# EAGLE board datalogger-hat-brd (EAGLE 9.2.2)
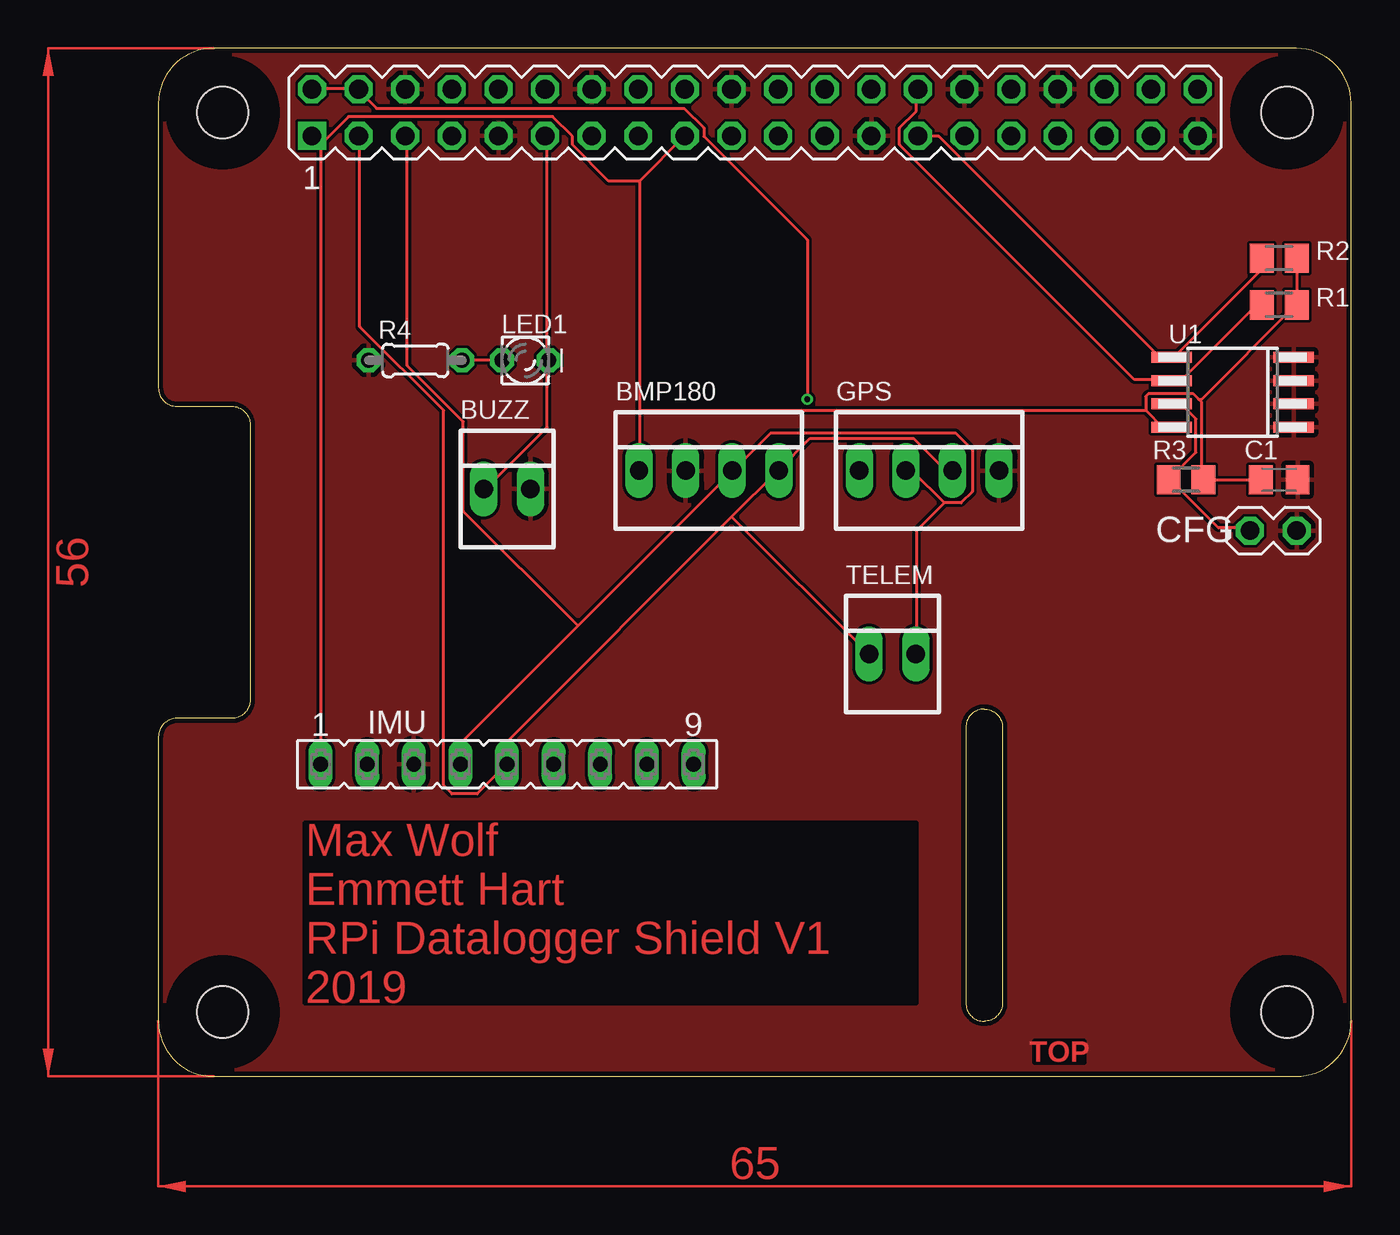
[diagram p0: board, top side]
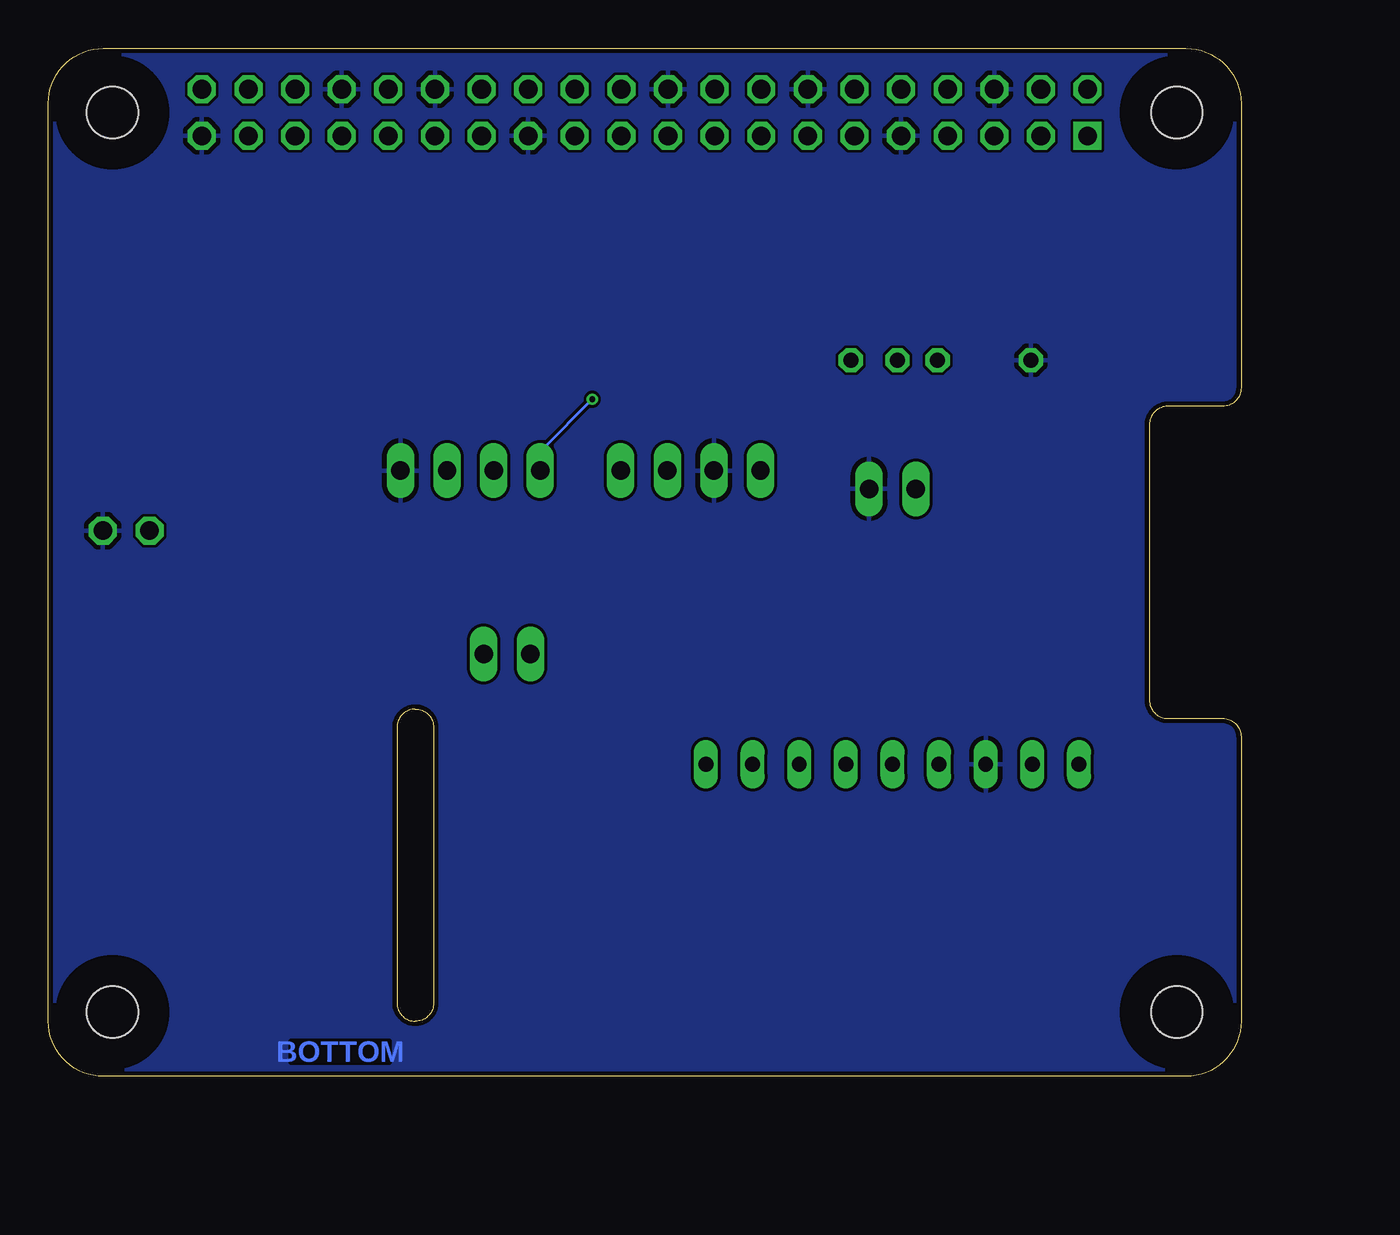
[diagram p1: board, bottom side, seen from below]

Size 65 x 56 mm. Coordinates in mm from the lower left corner, seen from the top.
Outline: 0,3 arc90 3,0 62,0 arc90 65,3 65,53 arc90 62,56 3,56 arc90 0,53 0,37.5 arc90 1,36.5 4,36.5 arc-90 5,35.5 5,20.5 arc-90 4,19.5 1,19.5 arc90 0,18.5 0,3
Outline: 44,19 44,4 arc90 45,3 arc90 46,4 46,19 arc90 45,20 arc90 44,19
Copper layers (1*16): Top 0.035mm / dielectric 1.5mm / Bottom 0.035mm
Design rules "ITEADstudio_DRC": minimum track width 6mil, minimum drill 12mil, track to track 6mil, track to pad 6mil, pad to pad 6mil, via to via 6mil, smd to smd 0mil, copper to edge 10mil, drill to drill 10mil, minimum pad ring 10mil, minimum via ring 6mil, stop-mask expansion 2mil, vias tented up to drill 100mil, thermal gap 10mil
Holes 2.8 mm at 3.5,3.5 3.5,52.5 61.5,52.5 61.5,3.5
tRestrict: area 1.9,51 to 5,54; area 60,51 to 63,54; area 60,1.9 to 63,5; area 1.9,1.9 to 5,5
bRestrict: area 1.9,1.9 to 5,5; area 1.9,51 to 5,54; area 60,1.9 to 63,5; area 60,51 to 63,54
Milling: 6 lines

## Footprints (pad centres in the part's own frame; a part is rotated, then mirrored left to right if it is on the bottom)
22-23-2041 = drill 1 long: 1 -3.81,0; 2 -1.27,0; 3 1.27,0; 4 3.81,0
22-23-2021 = drill 1 long: 1 -1.27,0; 2 1.27,0
C0805K = smd 1.3 x 1.6: 1 -1,0; 2 1,0
PIN_W_2 = drill 1.016 octagon: 1 0,0; 2 0,-2.54
FE09 = drill 0.813 long: 1 -10.16,0; 2 -7.62,0; 3 -5.08,0; 4 -2.54,0; 5 0,0; 6 2.54,0; 7 5.08,0; 8 7.62,0; 9 10.16,0
PIN_20X2 = drill 1.016 square: 1 -24.13,-1.27 | drill 1.016 octagon: 2 -24.13,1.27; 3 -21.59,-1.27; 4 -21.59,1.27; 5 -19.05,-1.27; 6 -19.05,1.27; 7 -16.51,-1.27; 8 -16.51,1.27; 9 -13.97,-1.27; 10 -13.97,1.27; 11 -11.43,-1.27; 12 -11.43,1.27; 13 -8.89,-1.27; 14 -8.89,1.27; 15 -6.35,-1.27; 16 -6.35,1.27; 17 -3.81,-1.27; 18 -3.81,1.27; 19 -1.27,-1.27; 20 -1.27,1.27; 21 1.27,-1.27; 22 1.27,1.27; 23 3.81,-1.27; 24 3.81,1.27; 25 6.35,-1.27; 26 6.35,1.27; 27 8.89,-1.27; 28 8.89,1.27; 29 11.43,-1.27; 30 11.43,1.27; 31 13.97,-1.27; 32 13.97,1.27; 33 16.51,-1.27; 34 16.51,1.27; 35 19.05,-1.27; 36 19.05,1.27; 37 21.59,-1.27; 38 21.59,1.27; 39 24.13,-1.27; 40 24.13,1.27
LED_LD260 = drill 0.813 octagon: A -1.27,0; K 1.27,0
M0805 = smd 1.3 x 1.6: 1 -0.95,0; 2 0.95,0
0204/5 = drill 0.813 octagon: 1 -2.54,0; 2 2.54,0
SOIC8 = smd 0.6 x 2.2: 1 -1.905,-3.33; 2 -0.635,-3.33; 3 0.635,-3.33; 4 1.905,-3.33; 5 1.905,3.33; 6 0.635,3.33; 7 -0.635,3.33; 8 -1.905,3.33

## Placement (x,y rotation side)
BMP180  22-23-2041  [22-23-2041]  30,33 0 top
BUZZ  22-23-2021  [22-23-2021]  19,32 0 top
C1  100nF  [C0805K]  61.08,32.5 0 top
CFG  [PIN_W_2]  59.48,29.73 90 top
GPS  22-23-2041  [22-23-2041]  42,33 0 top
IMU  [FE09]  19,17 0 top
K1  PIN20X2  [PIN_20X2]  32.5,52.5 0 top
LED1  [LED_LD260]  20,39 0 top
R1  3k9  [M0805]  61.08,42.02 0 top
R2  3k9  [M0805]  61.08,44.56 0 top
R3  1k  [M0805]  55.99,32.5 0 top
R4  220  [0204/5]  14,39 0 top
TELEM  22-23-2021  [22-23-2021]  40,23 0 top
U1  EEPROM24  [SOIC8]  58.53,37.26 90 top

## Library data of the parts
BMP180 GPS = con-molex; MF: MOLEX; MPN: 22-23-2041; OC_FARNELL: 1462920; OC_NEWARK: 38C0355
BUZZ TELEM = con-molex; MF: MOLEX; MPN: 22-23-2021; OC_FARNELL: 1462926; OC_NEWARK: 25C3832
C1 = resistor; DIELECTRIC: X7R
CFG K1 U1 = FLYFISH
IMU = con-lsta; OC_FARNELL: unknown; OC_NEWARK: unknown
LED1 = eagle-ltspice; SPICEMODEL: NONE; SPICEPREFIX: D; SPICETYPE: diode
R1-R3 = resistor; TOLERANCE: 5%
R4 = rcl; SPICEPREFIX: R

## Nets
+3V3: BMP180.1 C1.1 IMU.1 K1.1 K1.17 R1.2 R2.2 R3.2 U1.8
+5V: GPS.1 K1.2 K1.4
GND: BMP180.2 BUZZ.2 C1.2 CFG.2 GPS.4 IMU.3 K1.6 K1.9 K1.14 K1.20 K1.25 K1.30 K1.34 K1.39 R4.1 U1.1 U1.2 U1.3 U1.4
N$1: K1.28 R1.1 U1.6
N$2: K1.27 R2.1 U1.5
N$3: CFG.1 R3.1 U1.7
N$4: BMP180.4 GPS.3 IMU.5 K1.3 TELEM.1
N$5: BMP180.3 GPS.2 IMU.4 K1.5 TELEM.2
N$6: BUZZ.1 K1.11 LED1.K
N$7: LED1.A R4.2

## Tracks (layer width: path | path; a pad name or v marks a point on that pad's centre or on a via)
+3V3
  Top 0.152: 8.84,50.75 8.84,17.07 IMU.1 | 8.84,50.75 8.38,51.21 K1.1 8.84,50.75 | R2.2 62.03,44.5 62.03,42.06 R1.2 61.87,41.91 56.84,36.88 56.69,36.88 | C1.1 60.05,32.46 57,32.46 R3.2 56.84,32.61 56.84,36.73 56.69,36.88 | 53.8,36.27 54.71,35.36 55.17,35.36 U1.8 | 53.8,36.27 53.8,37.03 53.95,37.19 56.39,37.19 56.69,36.88 | 26.21,48.77 26.21,36.27 | 26.21,36.27 26.21,33.07 BMP180.1 | 26.21,48.77 28.65,51.21 K1.17 | 26.21,36.27 53.8,36.27 | 8.84,50.75 10.36,52.27 21.49,52.27 22.55,51.21 22.55,50.75 24.54,48.77 26.21,48.77
+5V  (via drill 0.3)
  Top 0.152: K1.2 8.38,53.8 10.82,53.8 K1.4 10.97,53.65 11.89,52.73 28.65,52.73 29.72,51.66 29.72,51.21 35.36,45.57 v35.36,36.88
  Bottom 0.152: v35.36,36.88 38.1,34.14 38.1,33.07 GPS.1
GND
  pour Bottom: 0,3 arc90 3,0 62,0 arc90 65,3 65,53 arc90 62,56 3,56 arc90 0,53 0,37.5 arc90 1,36.5 4,36.5 arc-90 5,35.5 5,20.5 arc-90 4,19.5 1,19.5 arc90 0,18.5
  pour Top: 0,3 arc90 3,0 62,0 arc90 65,3 65,53 arc90 62,56 3,56 arc90 0,53 0,37.5 arc90 1,36.5 4,36.5 arc-90 5,35.5 5,20.5 arc-90 4,19.5 1,19.5 arc90 0,18.5
N$1
  Top 0.152: R1.1 60.05,41.91 59.74,41.91 55.78,37.95 55.32,37.95 U1.6 55.17,37.95 53.19,37.95 40.39,50.75 40.39,51.66 41.3,52.58 41.3,53.65 K1.28
N$2
  Top 0.152: R2.1 60.05,44.5 60.05,43.89 55.32,39.17 U1.5 55.17,39.17 54.56,39.17 42.52,51.21 41.45,51.21 K1.27
N$3
  Top 0.152: CFG.1 59.44,29.87 57.76,29.87 55.17,32.46 R3.1 55.17,32.61 56.54,33.98 56.54,35.81 55.78,36.58 55.32,36.58 U1.7
N$4
  Top 0.152: 31.24,30.48 33.68,32.92 BMP180.4 33.83,33.07 35.51,34.75 41.15,34.75 42.82,33.07 43.13,33.07 GPS.3 | 31.24,30.48 19.05,18.29 19.05,17.07 IMU.5 18.9,16.92 17.37,15.39 16,15.39 15.54,15.85 15.54,36.27 10.97,40.84 10.97,51.21 K1.3 | 31.24,30.48 38.71,23.01 TELEM.1
N$5
  Top 0.152: 22.86,24.54 31.24,32.92 BMP180.3 31.39,33.07 33.38,35.05 43.43,35.05 44.35,34.14 44.35,31.85 43.74,31.24 42.82,31.24 | 22.86,24.54 16.61,18.29 16.61,17.07 IMU.4 | 22.86,24.54 16.61,30.79 16.61,35.66 13.56,38.71 13.56,51.21 K1.5 | 42.82,31.24 41.15,32.92 40.84,32.92 GPS.2 | 42.82,31.24 41.3,29.72 41.3,23.01 TELEM.2
N$6
  Top 0.152: BUZZ.1 17.83,32 21.18,35.36 21.18,38.86 LED1.K 21.18,39.01 21.18,51.21 K1.11
N$7
  Top 0.152: R4.2 16.61,39.01 18.59,39.01 LED1.A
(copper drawn outside any net)
  shapes: Top area x2

## Text on the board
Top: Max Wolf / Emmett Hart / RPi Datalogger Shield V1 / 2019 | TOP
Bottom: BOTTOM